# Altium PCB PCB1.PcbDoc
Units mil, origin at the board's own origin, x right, y up, seen from the top; angles counter-clockwise.
Board outline 6000 x 4000 mil, 2 copper layers (Top Layer, Bottom Layer); 48 components, 37 nets, 350 pads, 72 vias.
Unrouted connection lines stored in the file: 79.
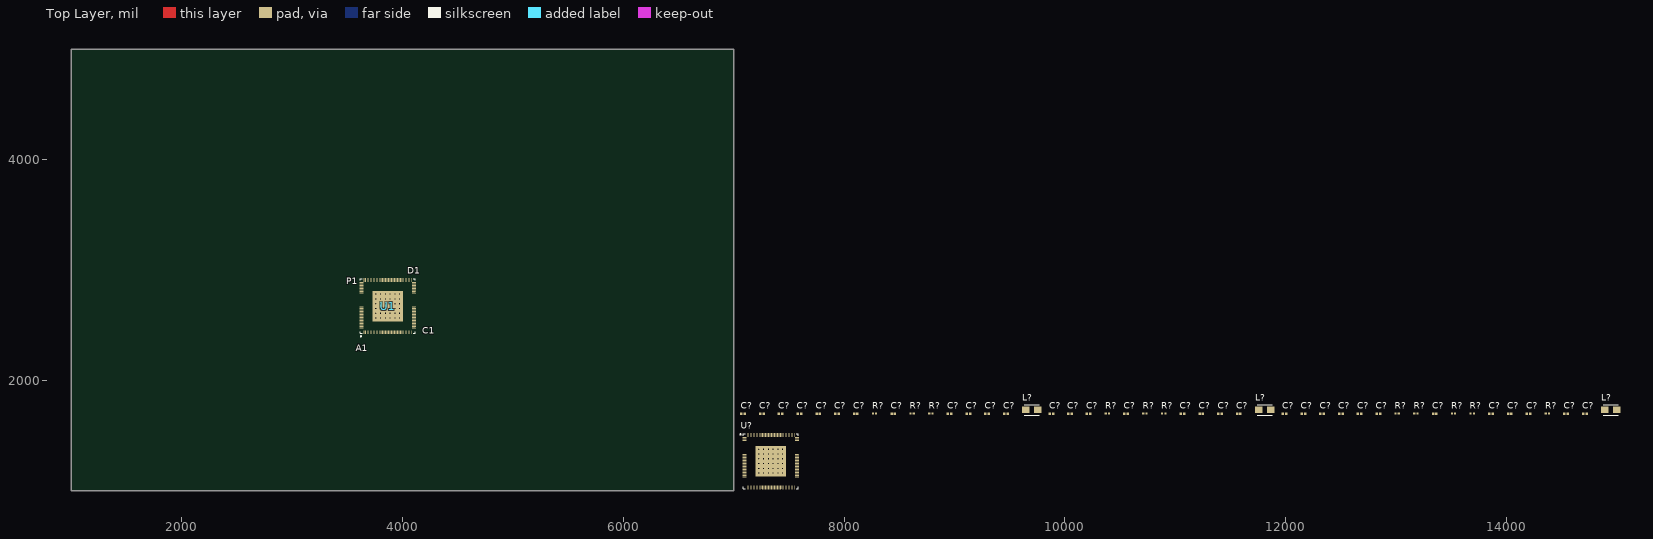
[diagram p0: Top Layer view]
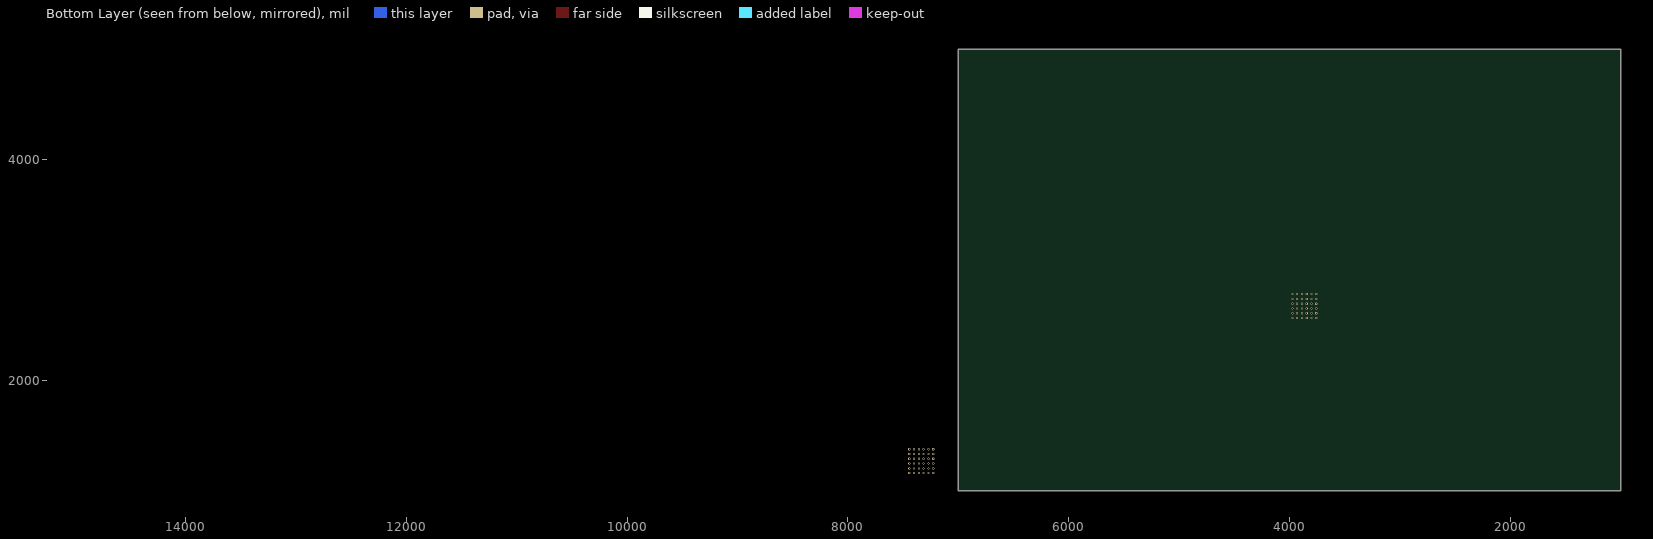
[diagram p1: Bottom Layer view, seen from below]

## Layer stack, top to bottom
Top Solder: solder mask 0.4, Solder Resist, Dk 3.5
Top Layer: signal copper 1.4
Dielectric 1: dielectric 12.6, FR-4, Dk 4.8
Bottom Layer: signal copper 1.4
Bottom Solder: solder mask 0.4, Solder Resist, Dk 3.5

## Board outline
1000,1000 7000,1000 7000,5000 1000,5000

## Design rules (kind name [scope] priority, off if disabled: settings)
Clearance [All] p1: gap=10 ignorepadtopadclearanceinfootprint=FALSE
DiffPairsRouting [All] p1: maxlimit=10 minlimit=10 mostfreqgap=10 toplayer_minwidth=15 toplayer_maxwidth=15 toplayer_prefwidth=15 bottomlayer_minwidth=15 bottomlayer_maxwidth=15 bottomlayer_prefwidth=15 maxuncoupledlength=500
PolygonConnect [All] p1: connectstyle=Relief reliefconductorwidth=10 reliefentries=4 polygonreliefangle="90 Angle" airgapwidth=10
RoutingVias [All] p1: holewidth=28 width=50 viastyle="Through Hole" minholewidth=28 minwidth=50 maxholewidth=28 maxwidth=50
SolderMaskExpansion [All] p1: expansion=4 istentingtop=FALSE
SupplyNets "Schematic Supply Nets_2" [InNet('+5')] p1: voltage=0.000
SupplyNets "Schematic Supply Nets_1" [InNet('A13')] p2: voltage=0.000
SupplyNets "Schematic Supply Nets" [InNet('GND')] p3: voltage=0.000
Width [All] p1: maxlimit=10 minlimit=10 preferedwidth=10
29 further rules are at their usual default settings.

## Classes and differential pairs
differential pair class CSI: CSI_RX_D0 CSI_RX_D1 CSI_RX_D2 CSI_RX_D3
net class CSI_DIFF: CSI_RX_CLK0N CSI_RX_CLK0P CSI_RX_D0_N CSI_RX_D0_P CSI_RX_D1_N CSI_RX_D1_P CSI_RX_D2_N CSI_RX_D2_P CSI_RX_D3_N CSI_RX_D3_P
component class THERMAL: J2
component class Sheet1: U1
component class ETHER: J?
component class CSI: J1
component class Sheet2: C? L? R?
differential pair CSI_RX_D3: +CSI_RX_D3_P -CSI_RX_D3_N
differential pair CSI_RX_D2: +CSI_RX_D2_P -CSI_RX_D2_N
differential pair CSI_RX_D1: +CSI_RX_D1_P -CSI_RX_D1_N
differential pair CSI_RX_D0: +CSI_RX_D0_P -CSI_RX_D0_N

## Components (designator, comment, footprint, x,y, rotation, side; value= is the part's Value field where it differs from the comment)
C? "*" CAPC1005X56X25LL10T15 14200,1700 r0 top
C? "*" CAPC1005X56X25LL10T15 7595,1700 r0 top
C? "*" CAPC1005X56X25LL10T15 7765,1700 r0 top
C? "*" CAPC1005X56X25LL10T15 7425,1700 r0 top
C? "*" CAPC1005X56X25LL10T15 8955,1700 r0 top
C? "*" CAPC1005X56X25LL10T15 12670,1700 r0 top
C? "*" CAPC1005X56X25LL10T15 11990,1700 r0 top
C? "*" CAPC1005X56X25LL10T15 14030,1700 r0 top
C? "*" CAPC1005X56X25LL10T15 13860,1700 r0 top
C? "*" CAPC1005X56X25LL10T15 12840,1700 r0 top
C? "*" CAPC1005X56X25LL10T15 12500,1700 r0 top
C? "*" CAPC1005X56X25LL10T15 12160,1700 r0 top
C? "*" CAPC1005X56X25LL10T15 12330,1700 r0 top
C? "*" CAPC1005X56X25LL10T15 7085,1700 r0 top
C? "*" CAPC1005X56X25LL10T15 7255,1700 r0 top
C? "1uf" CAPC1005X56X25LL10T15 9295,1700 r0 top
C? "*" CAPC1005X56X25LL10T15 7935,1700 r0 top
C? "*" CAPC1005X56X25LL10T15 9125,1700 r0 top
C? "*" CAPC1005X56X25LL10T15 8105,1700 r0 top
C? "100UF" CAPC1005X56X25LL10T15 9880,1700 r0 top
C? "100nf" CAPC1005X56X25LL10T15 13350,1700 r0 top
C? "1UF" CAPC1005X56X25LL10T15 10045,1700 r0 top
C? "1UF" CAPC1005X56X25LL10T15 11065,1700 r0 top
C? "1uf" CAPC1005X56X25LL10T15 11405,1700 r0 top
C? "1uf" CAPC1005X56X25LL10T15 14540,1700 r0 top
C? "46uf" CAPC1005X56X25LL10T15 14710,1700 r0 top
C? "47UF" CAPC1005X56X25LL10T15 10215,1700 r0 top
C? "47UF" CAPC1005X56X25LL10T15 11235,1700 r0 top
C? "47uf" CAPC1005X56X25LL10T15 9465,1700 r0 top
C? "47uf" CAPC1005X56X25LL10T15 11575,1700 r0 top
C? "dnp" CAPC1005X56X25LL10T15 8445,1700 r0 top
C? "" CAPC1005X56X25LL10T15 10555,1700 r0 top
L? "" FP-LQH31CN_03-MFG 14945,1735 r0 top
L? "" FP-LQH31CN_03-MFG 9700,1735 r0 top
L? "" FP-LQH31CN_03-MFG 11810,1735 r0 top
R? "42.8k" RESC1005X40X25LL05T10 8615,1700 r0 top
R? "10k" RESC1005X40X25LL05T10 14370,1700 r0 top
R? "126.5K" RESC1005X40X25LL05T10 10725,1700 r0 top
R? "178K" RESC1005X40X25LL05T10 10895,1700 r0 top
R? "239.6k" RESC1005X40X25LL05T10 13690,1700 r0 top
R? "10k" RESC1005X40X25LL05T10 13180,1700 r0 top
R? "451.3K" RESC1005X40X25LL05T10 13520,1700 r0 top
R? "9.89k" RESC1005X40X25LL05T10 8785,1700 r0 top
R? "99.3K" RESC1005X40X25LL05T10 10385,1700 r0 top
R? "99.6K" RESC1005X40X25LL05T10 13010,1700 r0 top
R? "99.6K" RESC1005X40X25LL05T10 8275,1700 r0 top
U1 "Component_2" QFN35P1230X1230X90_HS-129N 3865,2675 r90 top
U? "Component_2" QFN35P1230X1230X90_HS-129N 7335,1270 r0 top

## Footprints (in the part's own frame and the unit in brackets; to place one, negate y for a bottom-side part, rotate by r counter-clockwise, add the part's x,y. Pads: shape width x height; smd on the part's side, far side on the other; paste and mask are expansions set on the pad)
CAPC1005X56X25LL10T15 [mm] "Chip Capacitor, 2-Leads, Body 1.00x0.50mm, IPC High Density"
  rect 0.58x0.54 smd: 1(-0.39,0) 2(0.39,0)
  body extent -0.55,-0.3 0.55,0.3, height 0.56
FP-LQH31CN_03-MFG [mm]
  rect 1.75x1.5 smd paste+0 mask+0: 1(-1.375,0) 2(1.375,0)
  silkscreen extent -1.75,-1.2 1.75,1.2, body extent -2.35,-1 2.35,1, height 0.25
QFN35P1230X1230X90_HS-129N [mm] "QFN, 128-Leads, Body 12.30x12.30mm, Pitch 0.35mm, Thermal Pad 7.00x7.00mm, IPC Medium Density"
  oval 0.9x0.15 smd: 1(-6.025,5.425) 2(-6.025,5.075) 3(-6.025,4.725) 4(-6.025,4.375) 5(-6.025,4.025) 6(-6.025,3.675) 7(-6.025,3.325) 8(-6.025,2.975) 9(-6.025,2.625) 10(-6.025,2.275) 11(-6.025,1.925) 12(-6.025,1.575) 13(-6.025,1.225) 14(-6.025,0.875) 15(-6.025,0.525) 16(-6.025,0.175) 17(-6.025,-0.175) 18(-6.025,-0.525) 19(-6.025,-0.875) 20(-6.025,-1.225) 21(-6.025,-1.575) 22(-6.025,-1.925) 23(-6.025,-2.275) 24(-6.025,-2.625) 25(-6.025,-2.975) 26(-6.025,-3.325) 27(-6.025,-3.675) 28(-6.025,-4.025) 29(-6.025,-4.375) 30(-6.025,-4.725) 31(-6.025,-5.075) 32(-6.025,-5.425) 65(6.025,-5.425) 66(6.025,-5.075) 67(6.025,-4.725) 68(6.025,-4.375) 69(6.025,-4.025) 70(6.025,-3.675) 71(6.025,-3.325) 72(6.025,-2.975) 73(6.025,-2.625) 74(6.025,-2.275) 75(6.025,-1.925) 76(6.025,-1.575) 77(6.025,-1.225) 78(6.025,-0.875) 79(6.025,-0.525) 80(6.025,-0.175) 81(6.025,0.175) 82(6.025,0.525) 83(6.025,0.875) 84(6.025,1.225) 85(6.025,1.575) 86(6.025,1.925) 87(6.025,2.275) 88(6.025,2.625) 89(6.025,2.975) 90(6.025,3.325) 91(6.025,3.675) 92(6.025,4.025) 93(6.025,4.375) 94(6.025,4.725) 95(6.025,5.075) 96(6.025,5.425)
  oval 0.15x0.9 smd: 33(-5.425,-6.025) 34(-5.075,-6.025) 35(-4.725,-6.025) 36(-4.375,-6.025) 37(-4.025,-6.025) 38(-3.675,-6.025) 39(-3.325,-6.025) 40(-2.975,-6.025) 41(-2.625,-6.025) 42(-2.275,-6.025) 43(-1.925,-6.025) 44(-1.575,-6.025) 45(-1.225,-6.025) 46(-0.875,-6.025) 47(-0.525,-6.025) 48(-0.175,-6.025) 49(0.175,-6.025) 50(0.525,-6.025) 51(0.875,-6.025) 52(1.225,-6.025) 53(1.575,-6.025) 54(1.925,-6.025) 55(2.275,-6.025) 56(2.625,-6.025) 57(2.975,-6.025) 58(3.325,-6.025) 59(3.675,-6.025) 60(4.025,-6.025) 61(4.375,-6.025) 62(4.725,-6.025) 63(5.075,-6.025) 64(5.425,-6.025) 97(5.425,6.025) 98(5.075,6.025) 99(4.725,6.025) 100(4.375,6.025) 101(4.025,6.025) 102(3.675,6.025) 103(3.325,6.025) 104(2.975,6.025) 105(2.625,6.025) 106(2.275,6.025) 107(1.925,6.025) 108(1.575,6.025) 109(1.225,6.025) 110(0.875,6.025) 111(0.525,6.025) 112(0.175,6.025) 113(-0.175,6.025) 114(-0.525,6.025) 115(-0.875,6.025) 116(-1.225,6.025) 117(-1.575,6.025) 118(-1.925,6.025) 119(-2.275,6.025) 120(-2.625,6.025) 121(-2.975,6.025) 122(-3.325,6.025) 123(-3.675,6.025) 124(-4.025,6.025) 125(-4.375,6.025) 126(-4.725,6.025) 127(-5.075,6.025) 128(-5.425,6.025)
  rect 7x7 smd: 129(0,0)
  silkscreen extent -7.07,-6.3 6.3,6.3, body extent -6.15,-6.15 6.15,6.15, height 0.9
RESC1005X40X25LL05T10 [mm] "Chip Resistor, 2-Leads, Body 1.00x0.50mm, IPC High Density"
  rect 0.5x0.45 smd: 1(-0.375,0) 2(0.375,0)
  body extent -0.53,-0.27 0.53,0.28, height 0.4

## Part data
C? C? C? C? C? C? C? C? C? C? C? C? C? C? C? C? C? C? C? C? C? C? C? C? C? C? C? C? C? C? C? C?: library part CMP-2008-02962-1
L? L? L?: library part CMP-06042-002477-1
R? R? R? R? R? R? R? R? R? R? R?: library part CMP-2002-07161-1

## Via types
v1: diameter 19.68, hole 7.87, Top Layer to Bottom Layer, 72 vias

## Nets (pads, with @x,y where several pads share a name; then routed paths per layer and width w, separated by ;. In a path a pad name is that pad's centre, name@x,y a point inside that pad or via, vN(x,y) a via of type N, cw(c..) or ccw(c..) an arc to the next point about the centre after c; other vN are vias at no path point)
+5: C?.2@7100.35,1700 C?.2@9895.35,1700 C?.2@12005.35,1700 R?.2@8799.76,1700 R?.2@10909.76,1700 R?.2@13704.76,1700 U?.3
A2: 
A3: 
A5: 
A6: 
A7: 
A10: C?.2@7270.35,1700 C?.2@7440.35,1700 C?.2@7610.35,1700 C?.2@7780.35,1700 C?.2@7950.35,1700 C?.2@8120.35,1700 C?.2@8970.35,1700 C?.2@9140.35,1700 C?.2@9310.35,1700 C?.2@9480.35,1700 C?.2@10060.35,1700 C?.2@10230.35,1700 C?.2@11080.35,1700 C?.2@11250.35,1700 C?.2@11420.35,1700 C?.2@11590.35,1700 L?.1@9645.87,1735 L?.1@11755.87,1735 R?.2@8629.76,1700 R?.2@10739.76,1700
A13: C?.2@12175.35,1700 C?.2@12345.35,1700 C?.2@12515.35,1700 C?.2@12685.35,1700 C?.2@12855.35,1700 C?.2@13875.35,1700 C?.2@14045.35,1700 C?.2@14555.35,1700 C?.2@14725.35,1700 L?.1@14890.87,1735 R?.1@13165.24,1700 R?.2@13534.76,1700 R?.2@14384.76,1700 U?.6
A23: 
A25: R?.2@13194.76,1700
CSI_RX_CLK0N: 
CSI_RX_CLK0P: 
CSI_RX_D0_N: 
CSI_RX_D0_P: 
CSI_RX_D1_N: 
CSI_RX_D1_P: 
CSI_RX_D2_N: 
CSI_RX_D2_P: 
CSI_RX_D3_N: 
CSI_RX_D3_P: 
D19: 
D20: 
D22: 
D23: 
D25: 
D26: 
D27: 
D28: 
D29: 
D30: 
D31: 
GND: C?.1@7069.65,1700 C?.1@7239.65,1700 C?.1@7409.65,1700 C?.1@7579.65,1700 C?.1@7749.65,1700 C?.1@7919.65,1700 C?.1@8089.65,1700 C?.1@8939.65,1700 C?.1@9109.65,1700 C?.1@9279.65,1700 C?.1@9449.65,1700 C?.1@9864.65,1700 C?.1@10029.65,1700 C?.1@10199.65,1700 C?.1@11049.65,1700 C?.1@11219.65,1700 C?.1@11389.65,1700 C?.1@11559.65,1700 C?.1@11974.65,1700 C?.1@12144.65,1700 C?.1@12314.65,1700 C?.1@12484.65,1700 C?.1@12654.65,1700 C?.1@12824.65,1700 C?.1@13844.65,1700 C?.1@14014.65,1700 C?.1@14184.65,1700 C?.1@14524.65,1700 C?.1@14694.65,1700 C?.2@8460.35,1700 C?.2@10570.35,1700 C?.2@13365.35,1700 R?.1@8260.24,1700 R?.1@10370.24,1700 R?.1@12995.24,1700 U?.2
NetC?_1: C?.1@8429.65,1700 R?.1@8770.24,1700 U?.5
NetL?_2: L?.2@9754.13,1735 U?.4
NetR?_1: R?.1@8600.24,1700 R?.2@8289.76,1700 U?.1
P12: C?.2@14215.35,1700 R?.1@14355.24,1700
TP: 
pads on no net: C?.1@10539.65,1700 C?.1@13334.65,1700 L?.2@11864.13,1735 L?.2@14999.13,1735 R?.1@10710.24,1700 R?.1@10880.24,1700 R?.1@13505.24,1700 R?.1@13675.24,1700 R?.2@10399.76,1700 R?.2@13024.76,1700 U1.1 U1.2 U1.3 U1.4 U1.5 U1.6 U1.7 U1.8 U1.9 U1.10 U1.11 U1.12 U1.13 U1.14 U1.15 U1.16 U1.17 U1.18 U1.19 U1.20 U1.21 U1.22 U1.23 U1.24 U1.25 U1.26 U1.27 U1.28 U1.29 U1.30 U1.31 U1.32 U1.33 U1.34 U1.35 U1.36 U1.37 U1.38 U1.39 U1.40 U1.41 U1.42 U1.43 U1.44 U1.45 U1.46 U1.47 U1.48 U1.49 U1.50 U1.51 U1.52 U1.53 U1.54 U1.55 U1.56 U1.57 U1.58 U1.59 U1.60 U1.61 U1.62 U1.63 U1.64 U1.65 U1.66 U1.67 U1.68 U1.69 U1.70 U1.71 U1.72 U1.73 U1.74 U1.75 U1.76 U1.77 U1.78 U1.79 U1.80 U1.81 U1.82 U1.83 U1.84 U1.85 U1.86 U1.87 U1.88 U1.89 U1.90 U1.91 U1.92 U1.93 U1.94 U1.95 U1.96 U1.97 U1.98 U1.99 U1.100 U1.101 U1.102 U1.103 U1.104 U1.105 U1.106 U1.107 U1.108 U1.109 U1.110 U1.111 U1.112 U1.113 U1.114 U1.115 U1.116 U1.117 U1.118 U1.119 U1.120 U1.121 U1.122 U1.123 U1.124 U1.125 U1.126 U1.127 U1.128 U1.129 U?.7 U?.8 U?.9 U?.10 U?.11 U?.12 U?.13 U?.14 U?.15 U?.16 U?.17 U?.18 U?.19 U?.20 U?.21 U?.22 U?.23 U?.24 U?.25 U?.26 U?.27 U?.28 U?.29 U?.30 U?.31 U?.32 U?.33 U?.34 U?.35 U?.36 U?.37 U?.38 U?.39 U?.40 U?.41 U?.42 U?.43 U?.44 U?.45 U?.46 U?.47 U?.48 U?.49 U?.50 U?.51 U?.52 U?.53 U?.54 U?.55 U?.56 U?.57 U?.58 U?.59 U?.60 U?.61 U?.62 U?.63 U?.64 U?.65 U?.66 U?.67 U?.68 U?.69 U?.70 U?.71 U?.72 U?.73 U?.74 U?.75 U?.76 U?.77 U?.78 U?.79 U?.80 U?.81 U?.82 U?.83 U?.84 U?.85 U?.86 U?.87 U?.88 U?.89 U?.90 U?.91 U?.92 U?.93 U?.94 U?.95 U?.96 U?.97 U?.98 U?.99 U?.100 U?.101 U?.102 U?.103 U?.104 U?.105 U?.106 U?.107 U?.108 U?.109 U?.110 U?.111 U?.112 U?.113 U?.114 U?.115 U?.116 U?.117 U?.118 U?.119 U?.120 U?.121 U?.122 U?.123 U?.124 U?.125 U?.126 U?.127 U?.128 U?.129
copper on no net:
  other v1: 7226.73,1161.73 7270.04,1161.73 7313.35,1161.73 7356.65,1161.73 7399.96,1161.73 7443.27,1161.73 7226.73,1205.04 7270.04,1205.04 7313.35,1205.04 7356.65,1205.04 7399.96,1205.04 7443.27,1205.04 7226.73,1248.35 7270.04,1248.35 7313.35,1248.35 7356.65,1248.35 7399.96,1248.35 7443.27,1248.35 7226.73,1291.65 7270.04,1291.65 7313.35,1291.65 7356.65,1291.65 7399.96,1291.65 7443.27,1291.65 7226.73,1334.96 7270.04,1334.96 7313.35,1334.96 7356.65,1334.96 7399.96,1334.96 7443.27,1334.96 7226.73,1378.27 7270.04,1378.27 7313.35,1378.27 7356.65,1378.27 7399.96,1378.27 7443.27,1378.27 3756.73,2566.73 3800.04,2566.73 3843.35,2566.73 3886.65,2566.73 3929.96,2566.73 3973.27,2566.73 3756.73,2610.04 3800.04,2610.04 3843.35,2610.04 3886.65,2610.04 3929.96,2610.04 3973.27,2610.04 3756.73,2653.35 3800.04,2653.35 3843.35,2653.35 3886.65,2653.35 3929.96,2653.35 3973.27,2653.35 3756.73,2696.65 3800.04,2696.65 3843.35,2696.65 3886.65,2696.65 3929.96,2696.65 3973.27,2696.65 3756.73,2739.96 3800.04,2739.96 3843.35,2739.96 3886.65,2739.96 3929.96,2739.96 3973.27,2739.96 3756.73,2783.27 3800.04,2783.27 3843.35,2783.27 3886.65,2783.27 3929.96,2783.27 3973.27,2783.27

## Silkscreen, mask and mechanical layers (free items; w line width, h text height)
Top Overlay:
  text "D1" at 4042.76,2969.94 h60
  text "P1" at 3487.76,2874.94 h60
  text "C1" at 4180,2425 h60
  text "A1" at 3575,2265 h60